# Altium PCB COG-C177MVHG-03.PcbDoc
Units mil, origin at the board's own origin, x right, y up, seen from the top; angles counter-clockwise.
Board outline 1800 x 2315 mil, 2 copper layers (Top Layer, Bottom Layer); 4 components, 15 nets, 50 pads, 2 vias.
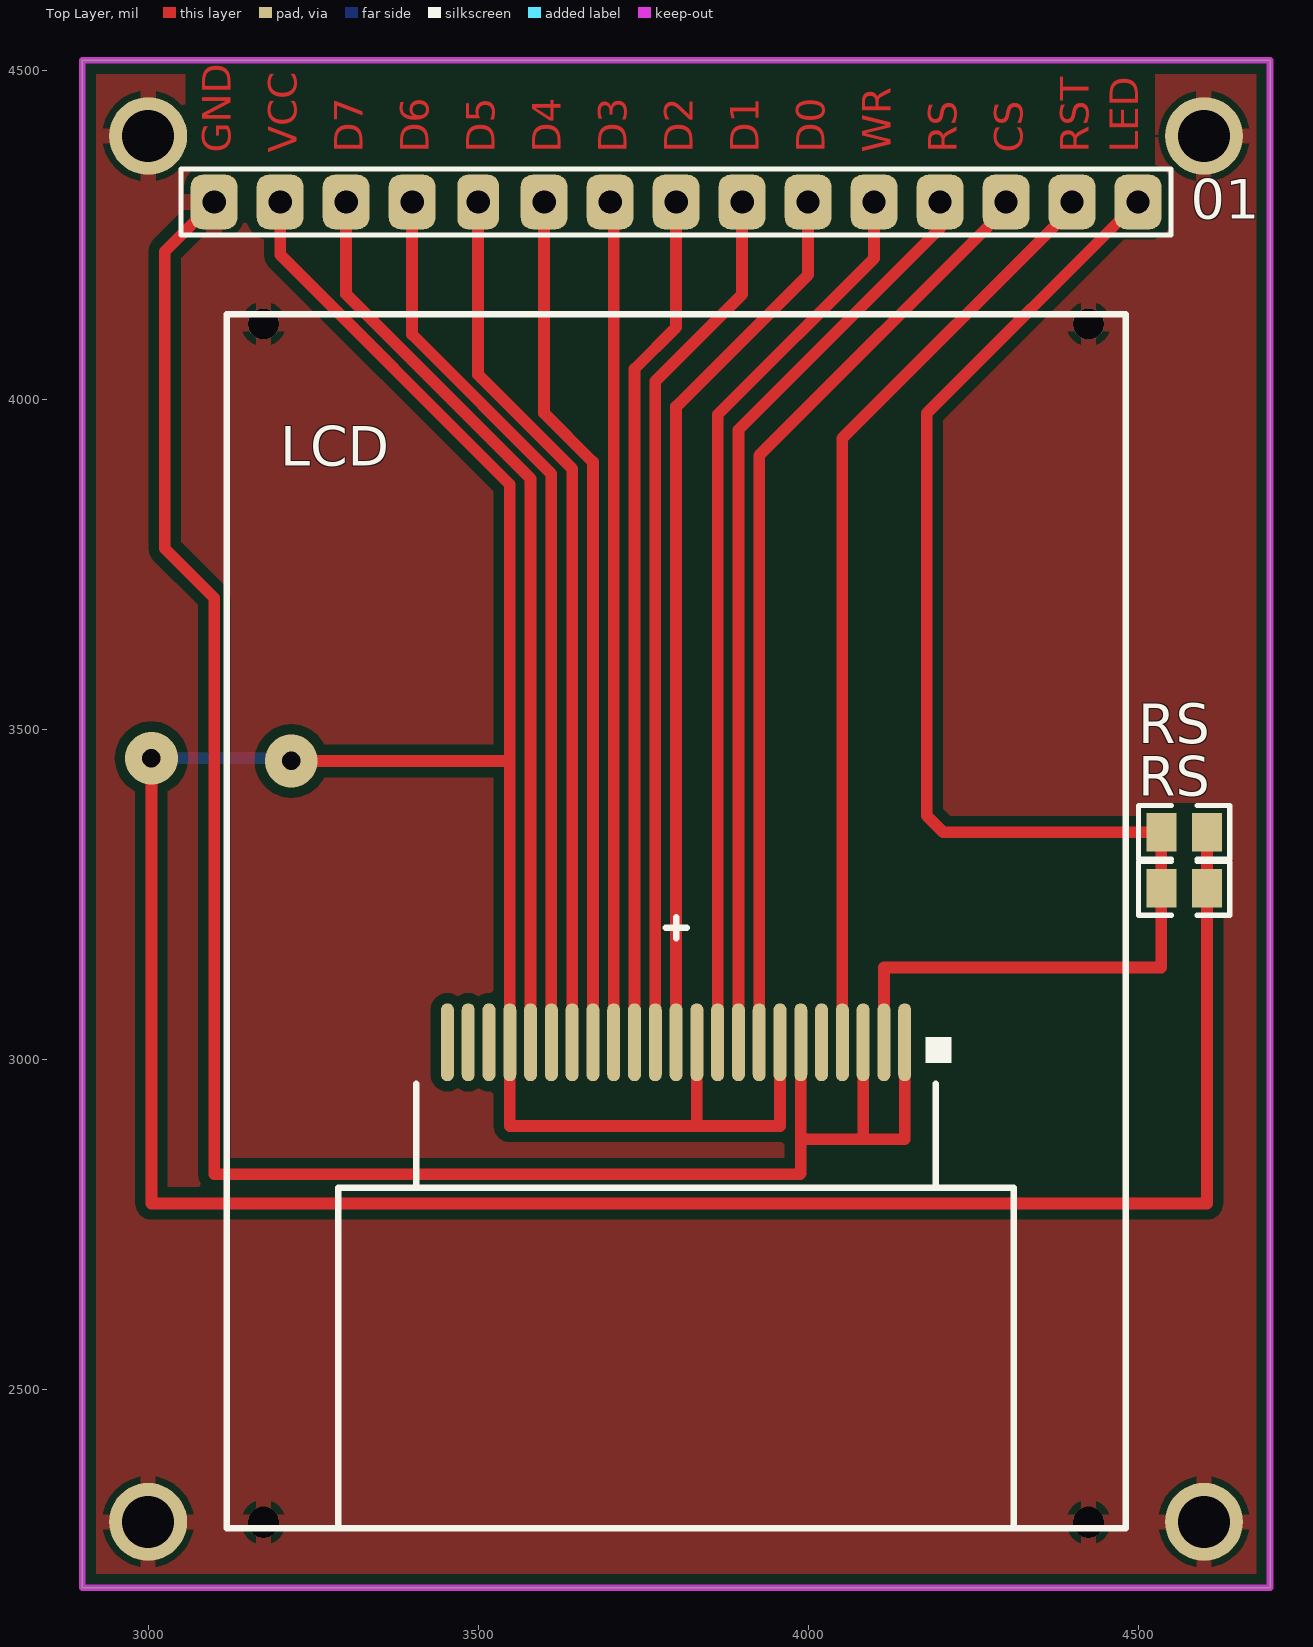
[diagram p0: Top Layer view]
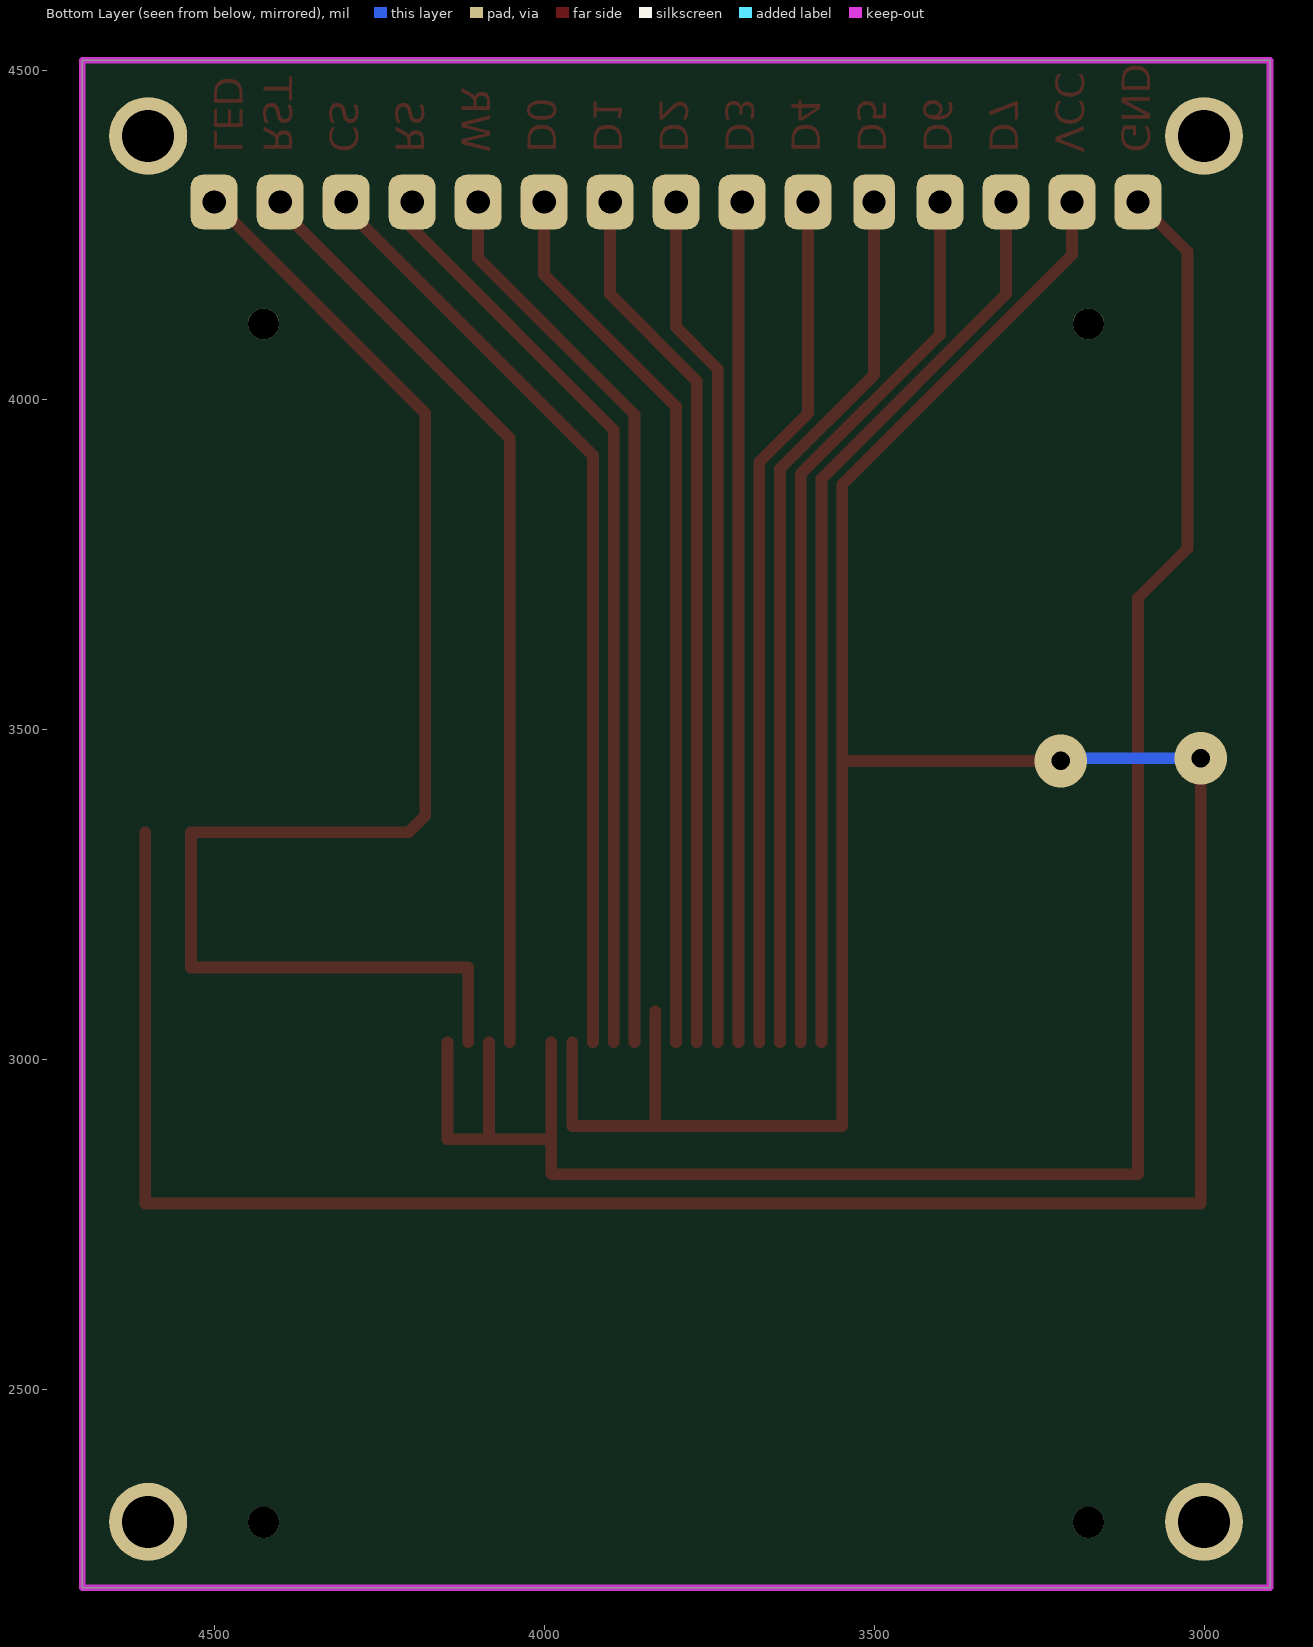
[diagram p1: Bottom Layer view, seen from below]

## Layer stack, top to bottom
Top Solder: solder mask 0.4, Solder Resist, Dk 3.5
Top Layer: signal copper 1.4
Dielectric 1: dielectric 12.6, FR-4, Dk 4.8
Bottom Layer: signal copper 1.4
Bottom Solder: solder mask 0.4, Solder Resist, Dk 3.5

## Board outline
2900,2200 4700,2200 4700,4515 2900,4515

## Design rules (kind name [scope] priority, off if disabled: settings)
Clearance [All] p1: gap=10
ComponentClearance [All] p1 off: gap=10 collisioncheckmode=3 verticalgap=10 showdistances=FALSE
Height [All] p1 off: minheight=0 maxheight=1000 prefheight=500
PlaneConnect [All] p1: planeconnectstyle=Relief reliefexpansion=20 reliefentries=4 reliefconductorwidth=23.62 reliefairgap=10
PolygonConnect [All] p1: connectstyle=Relief reliefconductorwidth=23.62 reliefentries=4 polygonreliefangle="90 Angle" airgapwidth=10
RoutingVias [All] p1: holewidth=28 width=50 viastyle="Through Hole" minholewidth=28 minwidth=50 maxholewidth=28 maxwidth=50
SolderMaskExpansion [All] p1: expansion=4
Width [All] p1: maxlimit=23.62 minlimit=17.72 preferedwidth=17.72
27 further rules are at their usual default settings.

## Classes and differential pairs
component class COG-C177MVHG-03: 01 LCD RS

## Components (designator, comment, footprint, x,y, rotation, side; value= is the part's Value field where it differs from the comment)
01 "" HDR1X15 3100,4300 r0 top (schematic designator P0)
LCD "COG-C177MVHG-03" COG-C177MVHG-03 3800,3200 r0 top locked
RS "" LC-0805_R 4570,3260 r0 top
RS "" LC-0805_R 4570,3345 r0 top

## Footprints (in the part's own frame and the unit in brackets; to place one, negate y for a bottom-side part, rotate by r counter-clockwise, add the part's x,y. Pads: shape width x height; smd on the part's side, far side on the other; paste and mask are expansions set on the pad)
COG-C177MVHG-03 [mm]
  round 1.2 hole 1.2: 0(-15.875,-22.875) 0(-15.875,23.25) 0(15.875,-22.875) 0(15.875,23.25)
  oval 0.5x3 smd: 1(8.8,-4.4) 2(8,-4.4) 3(7.2,-4.4) 4(6.4,-4.4) 5(5.6,-4.4) 6(4.8,-4.4) 7(4,-4.4) 8(3.2,-4.4) 9(2.4,-4.4) 10(1.6,-4.4) 11(0.8,-4.4) 12(0,-4.4) 13(-0.8,-4.4) 14(-1.6,-4.4) 15(-2.4,-4.4) 16(-3.2,-4.4) 17(-4,-4.4) 18(-4.8,-4.4) 19(-5.6,-4.4) 20(-6.4,-4.4) 21(-7.2,-4.4) 22(-8,-4.4) 23(-8.8,-4.4)
  silkscreen extent -17.3,-23.1 17.3,23.62
HDR1X15 [mm] "Connector; Header; 15 Position"
  rrect50% 1.8x2.1 hole 0.9: 1(0,0) 2(2.54,0) 3(5.08,0) 4(7.62,0) 6(12.7,0) 7(15.24,0) 8(17.78,0) 9(20.32,0) 10(22.86,0) 11(25.4,0) 12(27.94,0) 13(30.48,0) 14(33.02,0) 15(35.56,0)
  rrect50% 1.6x2.1 hole 0.9: 5(10.16,0)
  silkscreen extent -1.27,-1.27 36.83,1.27
LC-0805_R [mm]
  rect 1.16x1.47 smd: 1(-0.875,0) 2(0.875,0)
  silkscreen extent -1.76,-1.04 1.76,1.03, body extent -1,-0.62 1,0.63, height 0.49

## Part data
01: library part "Header 15", "Header, 15-Pin"
RS RS: library part Res1, "Resistor"

## Free pads (board coordinates)
  round 118.11 hole 78.74: 0(3000,4400) 2(4600,4400) 3(4600,2300) 4(3000,2300)

## Via types
v1: diameter 80, hole 28, Top Layer to Bottom Layer, 2 vias

## Nets (pads, with @x,y where several pads share a name; then routed paths per layer and width w, separated by ;. In a path a pad name is that pad's centre, name@x,y a point inside that pad or via, vN(x,y) a via of type N, cw(c..) or ccw(c..) an arc to the next point about the centre after c; other vN are vias at no path point)
CS: 01.13 LCD.8 | length 1428.2
  Top Layer w17.72: LCD.8 3925.98,3915.98 4300,4290 01.13
D0: 01.10 LCD.12 | length 1356.1
  Top Layer w17.72: LCD.12 3800,3990 4000,4190 01.10
D1: 01.9 LCD.13 | length 1327.7
  Top Layer w17.72: LCD.13 3768.5,4028.5 3900,4160 01.9
D2: 01.8 LCD.14 | length 1299.3
  Top Layer w17.72: LCD.14 3737.01,4047.01 3800,4110 01.8
D3: 01.7 LCD.15 | length 1275.5
  Top Layer w17.72: 01.7 3705.51,4294.49 LCD.15
D4: 01.6 LCD.16 | length 1303.9
  Top Layer w17.72: 01.6 3600,3980 3674.02,3905.98 LCD.16
D5: 01.5 LCD.17 | length 1332.3
  Top Layer w17.72: 01.5 3500,4038.39 3642.52,3895.87 LCD.17
D6: 01.4 LCD.18 | length 1360.6
  Top Layer w17.72: 01.4 3400,4099.2 3611.02,3888.17 LCD.18
D7: 01.3 LCD.19 | length 1389
  Top Layer w17.72: 01.3 3300,4160 3579.53,3880.47 LCD.19
GND: 01.1 LCD.0 LCD.1 LCD.3 LCD.6 pad.0 pad.2 pad.3 pad.4 | length 3074.9
  Top Layer w17.72: 01.1 3025,4225 3025,3775 3100,3700 3100,2827 3987.95,2827 3988.98,2828.02 3988.98,2880 ; LCD.6 3988.98,2880 ; LCD.3 4083.46,2881.54 ; LCD.1 4146.46,2880 4085,2880 4083.46,2881.54 ; 3988.98,2880 4083.46,2880 4083.46,2881.54
LEDA: 01.15 LCD.2 RS.1 | length 2166.7
  Top Layer w17.72: LCD.2 4114.96,3139.96 4115,3140 4535,3140 RS.1@4535,3345 ; 01.15 4180,3980 4180,3370 4205,3345 RS.1@4535,3345 ; RS.1@4535.55,3345 RS.1@4535,3345
RS: 01.12 LCD.9 | length 1399.8
  Top Layer w17.72: LCD.9 3894.49,3954.49 4200,4260 01.12
RST: 01.14 LCD.4 | length 1417.4
  Top Layer w17.72: LCD.4 4051.97,3941.97 4400,4290 01.14
VCC3.3: 01.2 LCD.7 LCD.11 LCD.20 RS.2 | length 5633
  Top Layer w17.72: v1(3005,3457) 3005,2782.55 4604.45,2782.55 4604.45,3260 RS.2@4604.45,3345 ; 01.2 3200,4220 3548.03,3871.97 3548.03,3451 ; v1(3217,3453) 3546.03,3453 3548.03,3451 ; 3831.5,2902.98 LCD.11@3831.5,3073.77 ; LCD.7 3957.48,2900 3548.03,2900 LCD.20 3548.03,3451
  Bottom Layer w17.72: v1(3005,3457) 3213,3457 v1(3217,3453)
WR: 01.11 LCD.10 | length 1371.4
  Top Layer w17.72: LCD.10 3862.99,3977.99 4100,4215 01.11
pads on no net: LCD.5 LCD.21 LCD.22 LCD.23

## Polygon pours and split planes (outlines as drawn)
GND on Top Layer "Top Layer-No Net" (solid, remove dead copper, pour order 0): 2900,4515 2900,2200 4700,2200 4700,4515

## Keep-outs
Keep-Out Layer:
  lines w10: 2900,2200 2900,4515 4700,4515 4700,2200 4400,2200 2900,2200

## Other copper
Top Layer:
  text "GND" at 3125,4375 h43.31 r90
  text "VCC" at 3225,4375 h43.31 r90
  text "D7" at 3325,4375 h43.31 r90
  text "D6" at 3425,4375 h43.31 r90
  text "D5" at 3525,4375 h43.31 r90
  text "D4" at 3625,4375 h43.31 r90
  text "D3" at 3725,4375 h43.31 r90
  text "D2" at 3825,4375 h43.31 r90
  text "D1" at 3925,4375 h43.31 r90
  text "D0" at 4025,4375 h43.31 r90
  text "WR" at 4125,4375 h43.31 r90
  text "RS" at 4225,4375 h43.31 r90
  text "CS" at 4325,4375 h43.31 r90
  text "RST" at 4425,4375 h43.31 r90
  text "LED" at 4500,4375 h43.31 r90